# Altium PCB RauchPB_Placa.PcbDoc
Units mm, origin at the board's own origin, x right, y up, seen from the top; angles counter-clockwise.
Board outline 50 x 50 mm, 2 copper layers (Top Layer, Bottom Layer); 24 components, 17 nets, 61 pads, 0 vias.
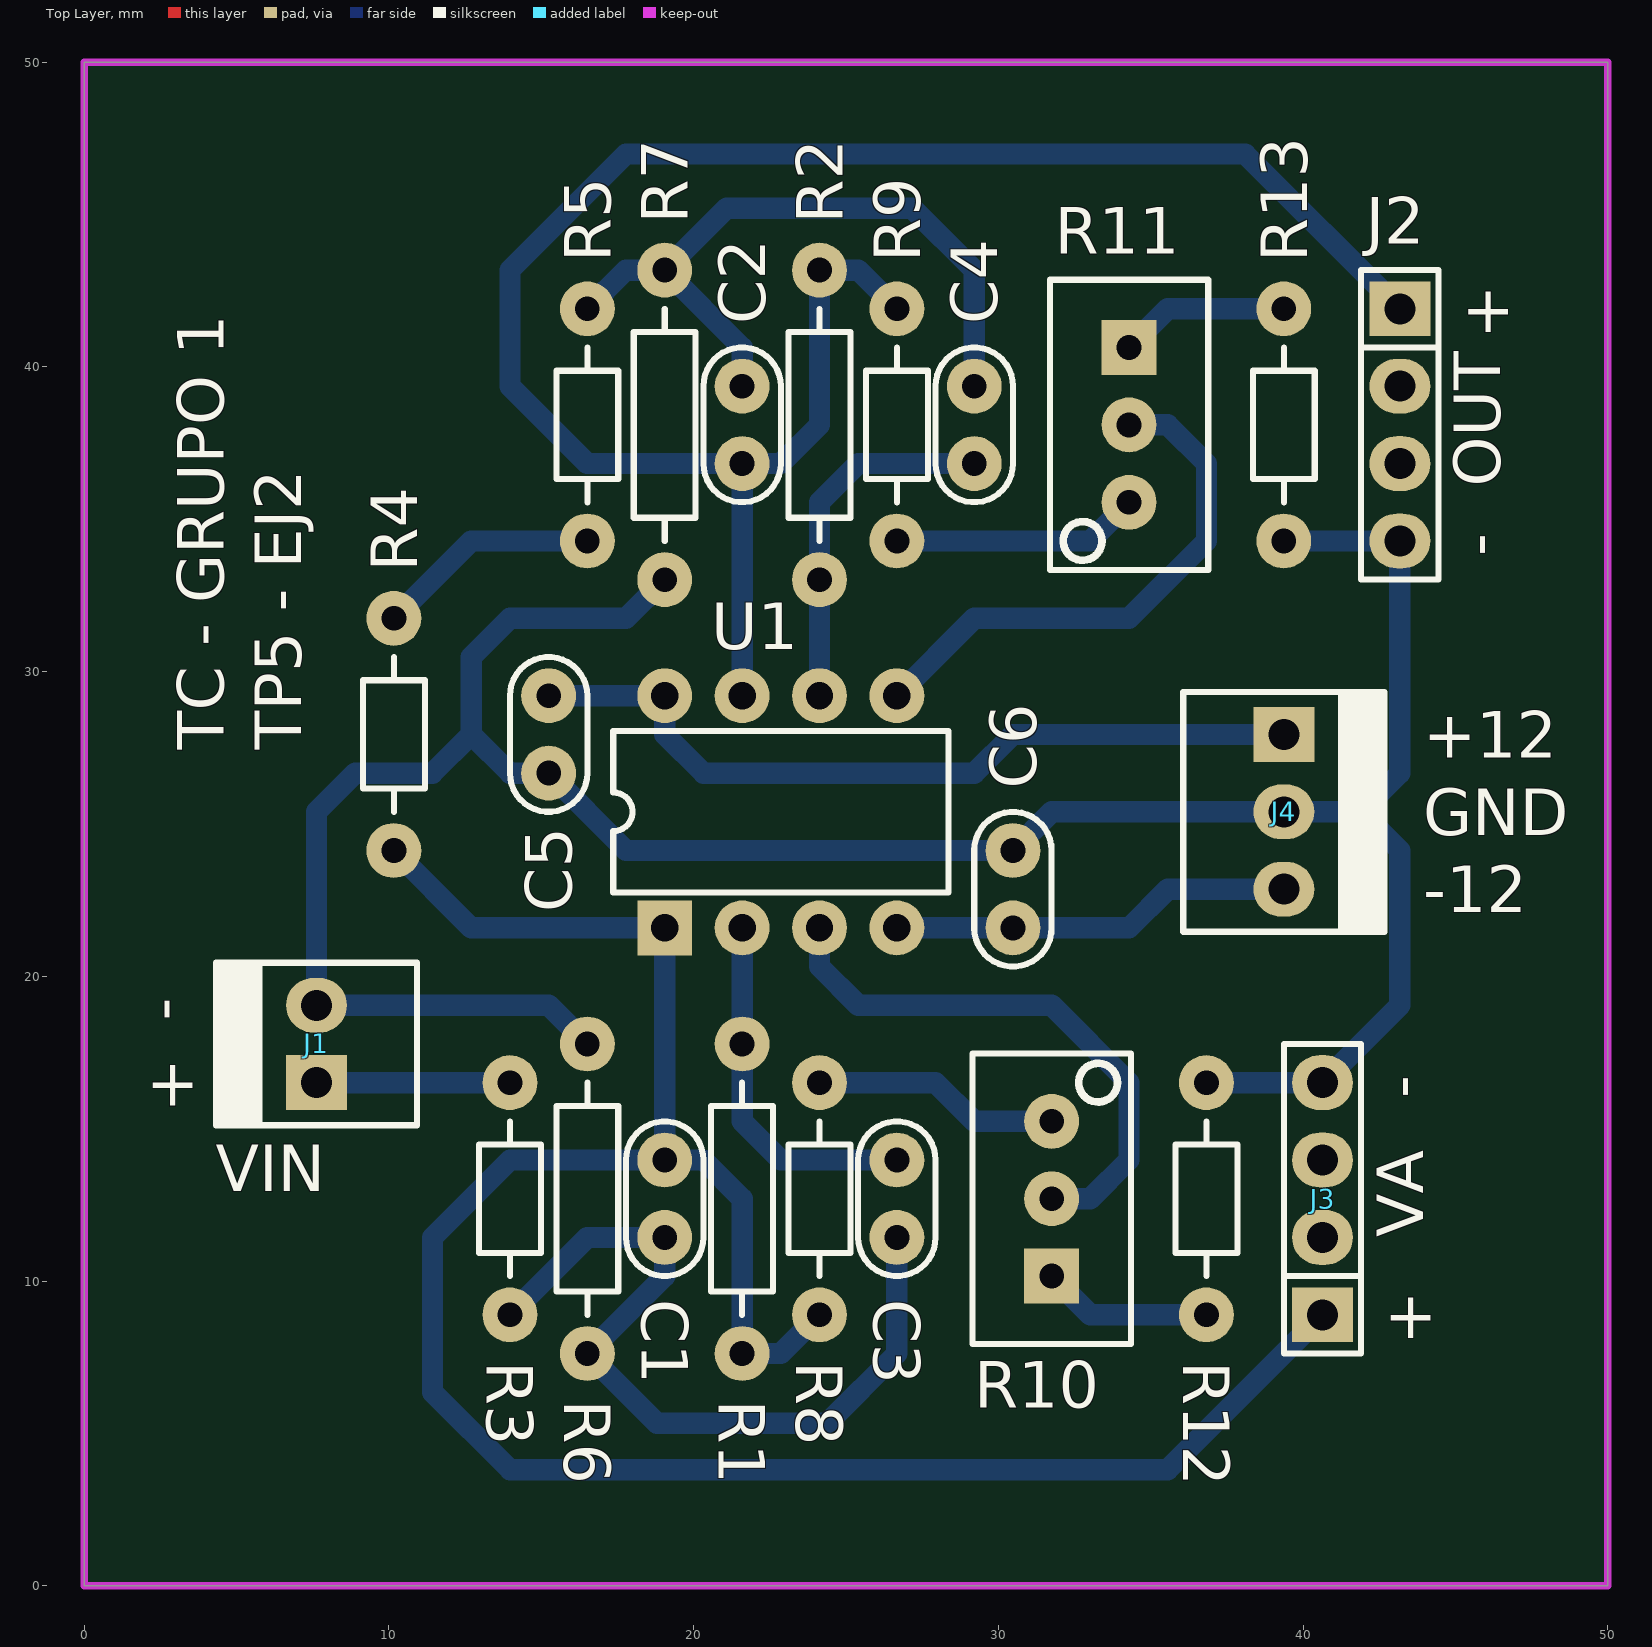
[diagram p0: Top Layer view]
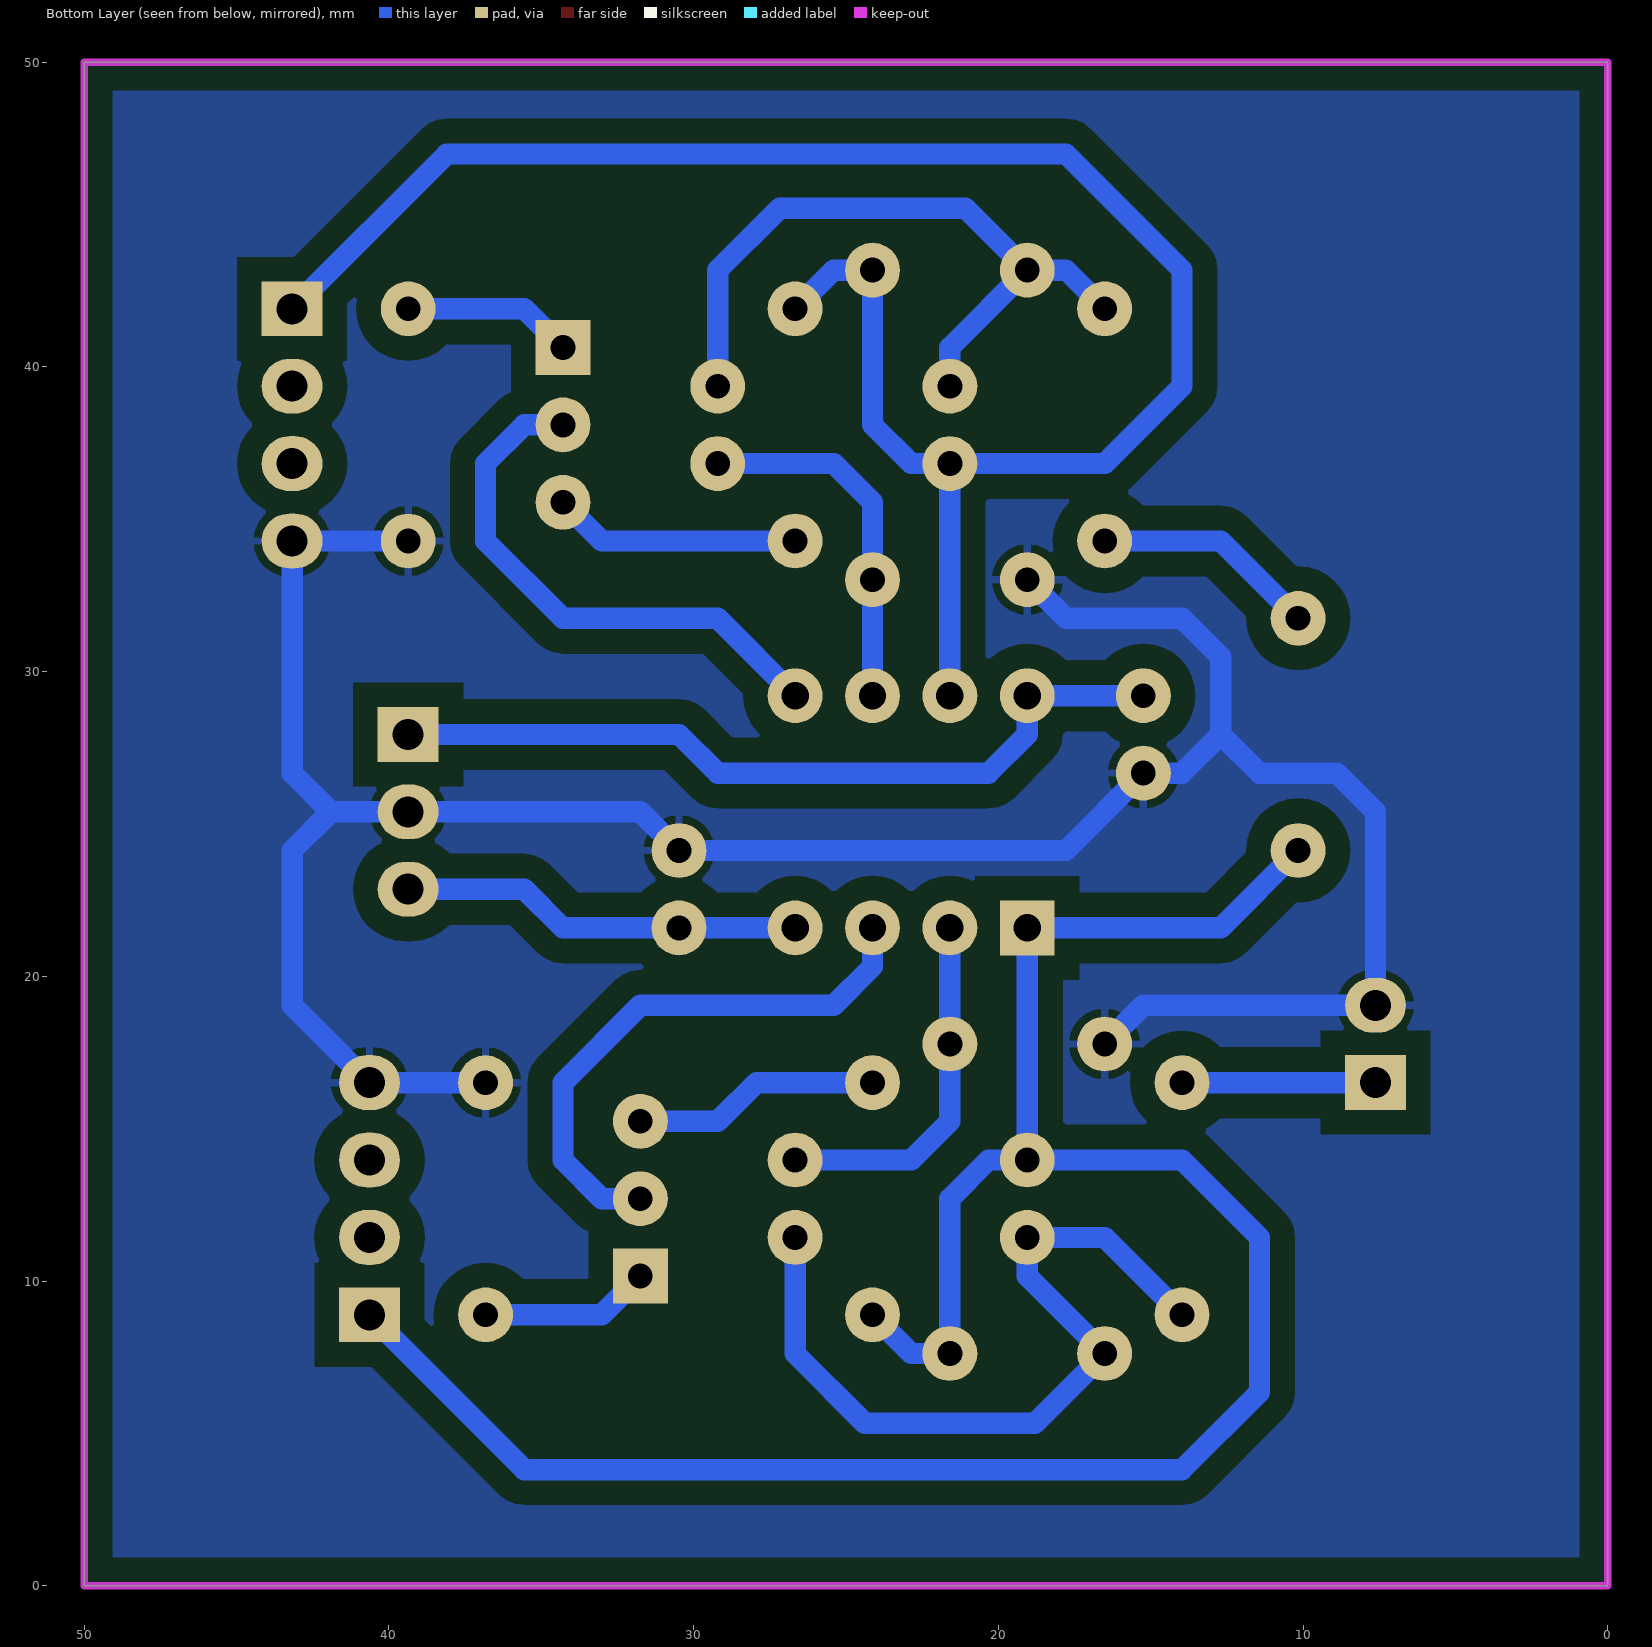
[diagram p1: Bottom Layer view, seen from below]
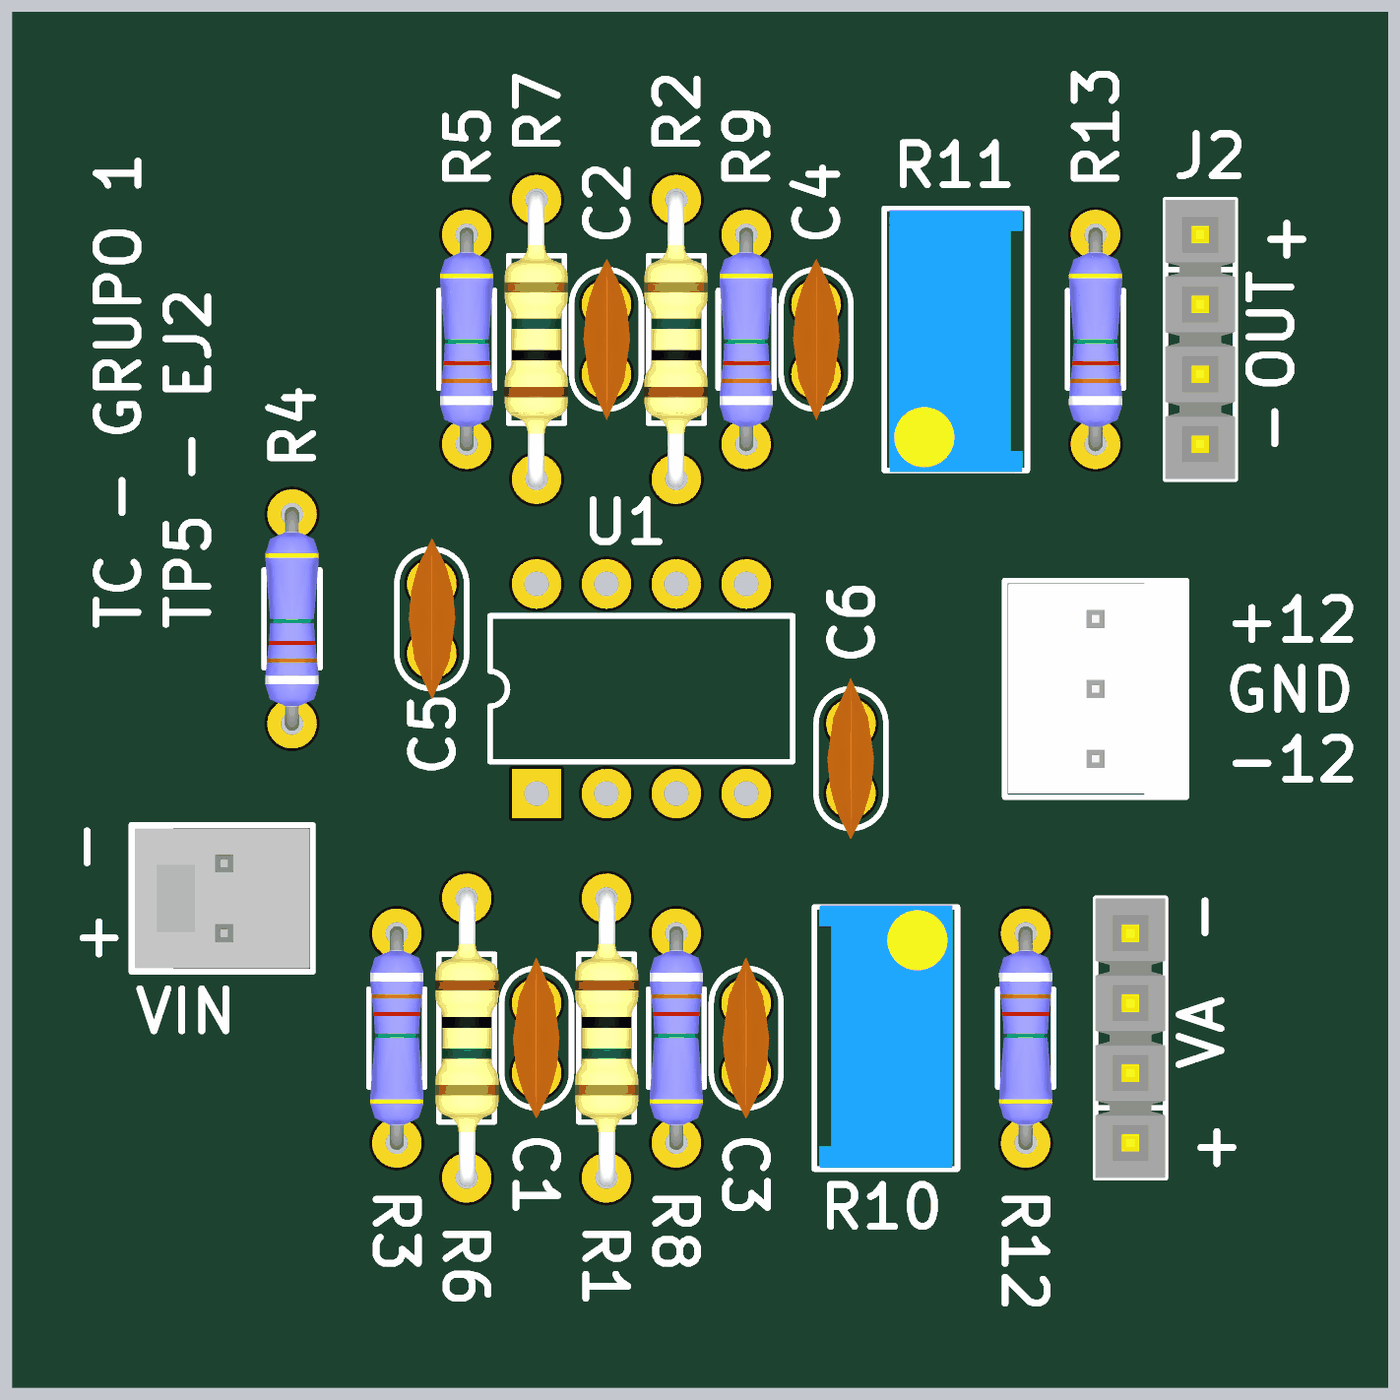
[diagram p2: 3D render of the assembled board from above, using the file's embedded part models]

## Layer stack, top to bottom
Top Solder: solder mask 0.0102, Solder Resist, Dk 3.5
Top Layer: signal copper 0.0356
Dielectric 1: dielectric 0.32, FR-4, Dk 4.8
Bottom Layer: signal copper 0.0356
Bottom Solder: solder mask 0.0102, Solder Resist, Dk 3.5

## Board outline
0,0 0,50 50,50 50,0

## Design rules (kind name [scope] priority, off if disabled: settings)
Clearance [All] p1: gap=0.7
PolygonConnect [All] p1: connectstyle=Relief reliefconductorwidth=0.254 reliefentries=4 polygonreliefangle="90 Angle" airgapwidth=0.254
RoutingVias [All] p1: holewidth=0.711 width=1.8 viastyle="Through Hole" minholewidth=0.711 minwidth=1.8 maxholewidth=0.711 maxwidth=1.8
SolderMaskExpansion [All] p1: expansion=0.102
Width [All] p1: maxlimit=0.7 minlimit=0.7 preferedwidth=0.7
30 further rules are at their usual default settings.

## Components (designator, comment, footprint, x,y, rotation, side; value= is the part's Value field where it differs from the comment)
C1 "470p" CAP100 19.05,12.7 r90 top
C2 "1n" CAP100 21.59,38.1 r270 top
C3 "470p" CAP100 26.67,12.7 r90 top
C4 "1n" CAP100 29.21,38.1 r270 top
C5 "100n" CAP100 15.24,27.94 r270 top
C6 "100n" CAP100 30.48,22.86 r90 top
J1 "V_IN" MOLEX2 7.62,16.51 r90 top
J2 "V_OUT" SIP4 43.18,38.1 r270 top
J3 "VA" SIP4 40.64,12.7 r90 top
J4 "FUENTE" MOLEX3 39.37,27.94 r270 top
R1 "30K" RES400 21.59,17.78 r270 top
R2 "13K" RES400 24.13,33.02 r90 top
R3 "100K" RES300 13.97,16.51 r270 top
R4 "27K" RES300 10.16,24.13 r90 top
R5 "15K" RES300 16.51,34.29 r90 top
R6 "3.3K" RES400 16.51,17.78 r270 top
R7 "1.5K" RES400 19.05,33.02 r90 top
R8 "8.2K" RES300 24.13,16.51 r270 top
R9 "8.2K" RES300 26.67,34.29 r90 top
R10 "200" "PRESET V" 31.75,12.7 r90 top
R11 "200" "PRESET V" 34.29,38.1 r270 top
R12 "1.5K" RES300 36.83,16.51 r270 top
R13 "1.5K" RES300 39.37,34.29 r90 top
U1 "TL082P" P008 22.86,25.4 r0 top

## Footprints (in the part's own frame and the unit in brackets; to place one, negate y for a bottom-side part, rotate by r counter-clockwise, add the part's x,y. Pads: shape width x height; smd on the part's side, far side on the other; paste and mask are expansions set on the pad)
CAP100 [mm]
  round 1.8 hole 0.813: 1(-1.27,0) 2(1.27,0)
  silkscreen extent -2.54,-1.27 2.54,1.27, body extent -2.92,-0.84 2.92,0.86, height 6.12
MOLEX2 [mm]
  rect 1.8x2 hole 1.016: 1(0,0)
  oval 1.8x2 hole 1.016: 2(2.54,0)
  silkscreen extent -1.4,-3.3 3.94,3.3, body extent -1.27,-3.17 3.81,3.18, height 10.74
MOLEX3 [mm]
  rect 1.8x2 hole 1.016: 1(0,0)
  oval 1.8x2 hole 1.016: 2(2.54,0) 3(5.08,0)
  silkscreen extent -1.4,-3.3 6.48,3.3, body extent -1.27,-3.18 6.35,3.18, height 10.74
P008 [mm] "DIP; 8 Leads; Row Spacing 7.62 mm; Pitch 2.54 mm"
  rect 1.8x1.8 hole 0.9: 1(-3.81,-3.81)
  round 1.8 hole 0.9: 2(-1.27,-3.81) 3(1.27,-3.81) 4(3.81,-3.81) 5(3.81,3.81) 6(1.27,3.81) 7(-1.27,3.81) 8(-3.81,3.81)
  silkscreen extent -5.5,-2.65 5.5,2.65
"PRESET V" [mm]
  rect 1.8x1.8 hole 0.813: 1(-2.54,0)
  round 1.8 hole 0.813: 2(0,0) 3(2.54,0)
  silkscreen extent -4.76,-2.6 4.76,2.6, body extent -4.7,-2.42 4.83,2.42, height 11.55
RES300 [mm]
  round 1.8 hole 0.813: 1(0,0) 2(7.62,0)
  silkscreen extent 1.27,-1.02 6.35,1.02, body extent -0.25,-0.97 7.87,0.97, height 2.01
RES400 [mm]
  round 1.8 hole 0.813: 1(0,0) 2(10.16,0)
  silkscreen extent 1.27,-1.02 8.89,1.02, body extent -0.3,-1.14 10.46,1.17, height 2.43
SIP4 [mm]
  rect 1.8x2 hole 1.016: 1(-3.81,0)
  oval 1.8x2 hole 1.016: 2(-1.27,0) 3(1.27,0) 4(3.81,0)
  silkscreen extent -5.08,-1.27 5.08,1.27, body extent -5.08,-1.27 5.08,1.27, height 8.38

## Part data
C1 C2 C3 C4 C5 C6: library part CAP
J1: library part MOLEX2
J2 J3: library part CON4
J4: library part MOLEX3
R1 R2 R3 R4 R5 R6 R7 R8 R9 R12 R13: library part RES
R10 R11: library part PRESET
U1: "JFET-Input Operational Amplifier"

## Nets (pads, with @x,y where several pads share a name; then routed paths per layer and width w, separated by ;. In a path a pad name is that pad's centre, name@x,y a point inside that pad or via, vN(x,y) a via of type N, cw(c..) or ccw(c..) an arc to the next point about the centre after c; other vN are vias at no path point)
+12V: C5.1 J4.1 U1.8 | length 26.5
  Bottom Layer w0.7: C5.1 U1.8 19.05,27.94 20.32,26.67 29.21,26.67 30.48,27.94 J4.1
-12V: C6.1 J4.3 U1.4 | length 13.2
  Bottom Layer w0.7: U1.4 C6.1 34.29,21.59 35.56,22.86 J4.3
GND: C5.2 C6.2 J1.2 J2.4 J3.4 J4.2 R6.1 R7.1 R12.1 R13.1 | length 90.7
  Bottom Layer w0.7: R6.1 15.24,19.05 J1.2 7.62,25.4 8.89,26.67 11.43,26.67 12.7,27.94 ; R7.1 17.78,31.75 13.97,31.75 12.7,30.48 12.7,27.94 ; R12.1 J3.4 43.18,19.05 43.18,24.13 41.91,25.4 ; R13.1 J2.4 43.18,26.67 41.91,25.4 ; 12.7,27.94 13.97,26.67 C5.2 17.78,24.13 C6.2 31.75,25.4 J4.2 41.91,25.4
NetC1_1: C1.1 C3.1 R3.2 R6.2 | length 26.9
  Bottom Layer w0.7: R3.2 16.51,11.43 C1.1 19.05,10.16 R6.2 18.796,5.334 24.384,5.334 26.67,7.62 C3.1
NetC1_2: C1.2 J3.1 R1.2 R4.1 R8.2 U1.1 | length 74.9
  Bottom Layer w0.7: R4.1 12.7,21.59 U1.1 C1.2 ; R8.2 22.86,7.62 R1.2 21.59,12.7 20.32,13.97 C1.2 ; J3.1 35.56,3.81 13.97,3.81 11.43,6.35 11.43,11.43 13.97,13.97 C1.2
NetC2_1: C2.1 C4.1 R5.2 R7.2 | length 23.6
  Bottom Layer w0.7: R5.2 17.78,43.18 R7.2 ; C2.1 21.59,40.64 R7.2 ; C4.1 29.21,43.18 27.178,45.212 21.082,45.212 R7.2
NetC2_2: C2.2 J2.1 R2.2 R9.2 U1.7 | length 64.2
  Bottom Layer w0.7: U1.7 C2.2 ; R9.2 25.4,43.18 R2.2 24.13,38.1 22.86,36.83 C2.2 ; J2.1 38.1,46.99 17.78,46.99 13.97,43.18 13.97,39.37 16.51,36.83 C2.2
NetC3_2: C3.2 R1.1 U1.2 | length 12
  Bottom Layer w0.7: U1.2 R1.1 21.59,15.24 22.86,13.97 C3.2
NetC4_2: C4.2 R2.1 U1.6 | length 12
  Bottom Layer w0.7: U1.6 R2.1 24.13,35.56 25.4,36.83 C4.2
NetJ1_1: J1.1 R3.1 | length 6.3
  Bottom Layer w0.7: J1.1 R3.1
NetR4_2: R4.2 R5.1 | length 7.4
  Bottom Layer w0.7: R4.2 12.7,34.29 R5.1
NetR8_1: R8.1 R10.3 | length 8.1
  Bottom Layer w0.7: R8.1 27.94,16.51 29.21,15.24 R10.3
NetR9_1: R9.1 R11.3 | length 8.1
  Bottom Layer w0.7: R9.1 33.02,34.29 R11.3
NetR10_1: R10.1 R12.2 | length 5.6
  Bottom Layer w0.7: R10.1 33.02,8.89 R12.2
NetR10_2: R10.2 U1.3 | length 18.6
  Bottom Layer w0.7: U1.3 24.13,20.32 25.4,19.05 31.75,19.05 34.29,16.51 34.29,13.97 33.02,12.7 R10.2
NetR11_1: R11.1 R13.2 | length 5.6
  Bottom Layer w0.7: R11.1 35.56,41.91 R13.2
NetR11_2: R11.2 U1.5 | length 17.9
  Bottom Layer w0.7: U1.5 29.21,31.75 34.29,31.75 36.83,34.29 36.83,36.83 35.56,38.1 R11.2
pads on no net: J2.2 J2.3 J3.2 J3.3

## Polygon pours and split planes (outlines as drawn)
GND on Bottom Layer "Top Overlay-No Net" (solid, remove dead copper, pour order 3): 0,50 50,50 50,0 0,0

## Keep-outs
Keep-Out Layer:
  the board outline again, w0.254

## Silkscreen, mask and mechanical layers (free items; w line width, h text height)
Top Overlay:
  text "+" at 45.212,41.148 h1.52
  text "OUT" at 46.482,36.068 h1.52 r90
  text "-" at 46.482,33.782 h1.52 r90
  text "TC - GRUPO 1" at 4.572,27.432 h1.52 r90
  text "TP5 - EJ2" at 7.112,27.432 h1.52 r90
  text "+12" at 43.942,27.178 h1.52
  text "GND" at 43.942,24.638 h1.52
  text "-12" at 43.942,22.098 h1.52
  text "-" at 3.302,18.542 h1.52 r90
  text "-" at 43.942,16.002 h1.52 r90
  text "+" at 2.032,15.748 h1.52
  text "VIN" at 4.318,12.954 h1.52
  text "VA" at 43.942,11.43 h1.52 r90
  text "+" at 42.672,8.128 h1.52